# Altium PCB PCB_relay-module_2025-10-18.pcbdoc
Units mil, origin at the board's own origin, x right, y up, seen from the top; angles counter-clockwise.
Board outline 2788.96 x 1968.99 mil, 2 copper layers (Top Layer, Bottom Layer); 8 components, 8 nets, 18 pads, 0 vias.
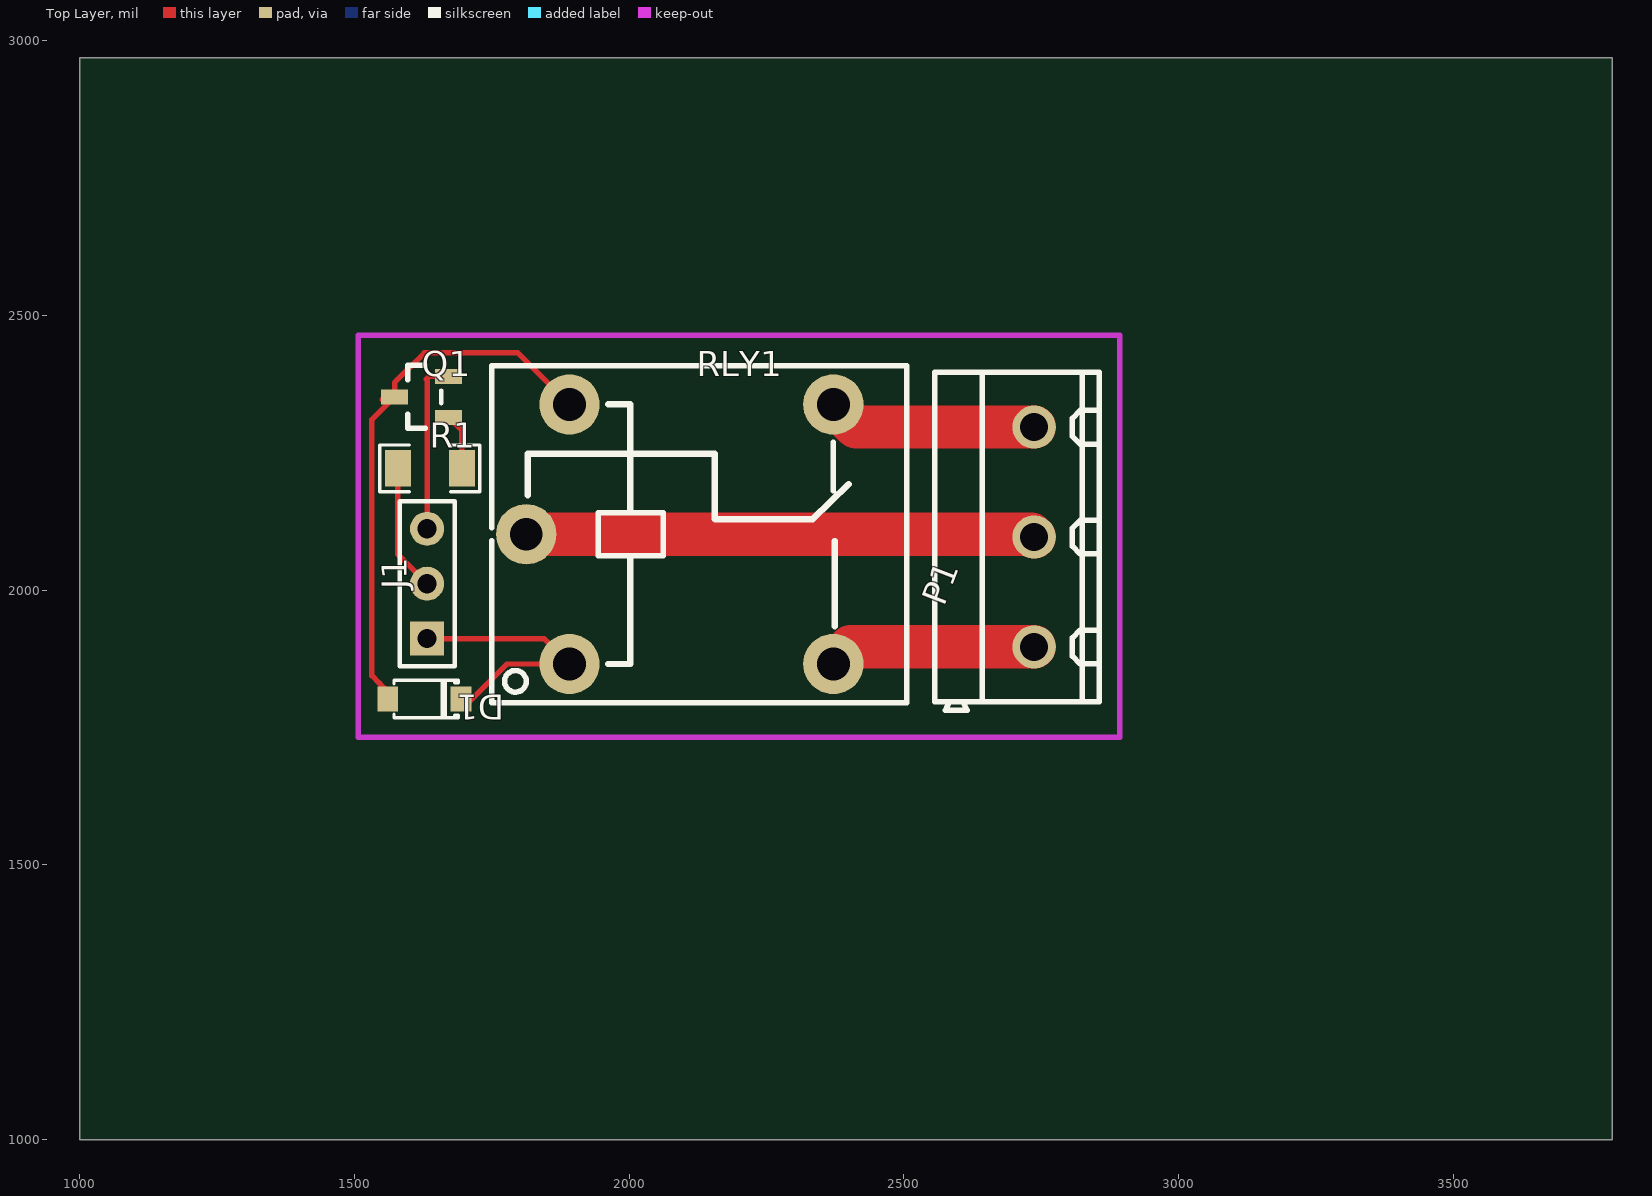
[diagram p0: Top Layer view]
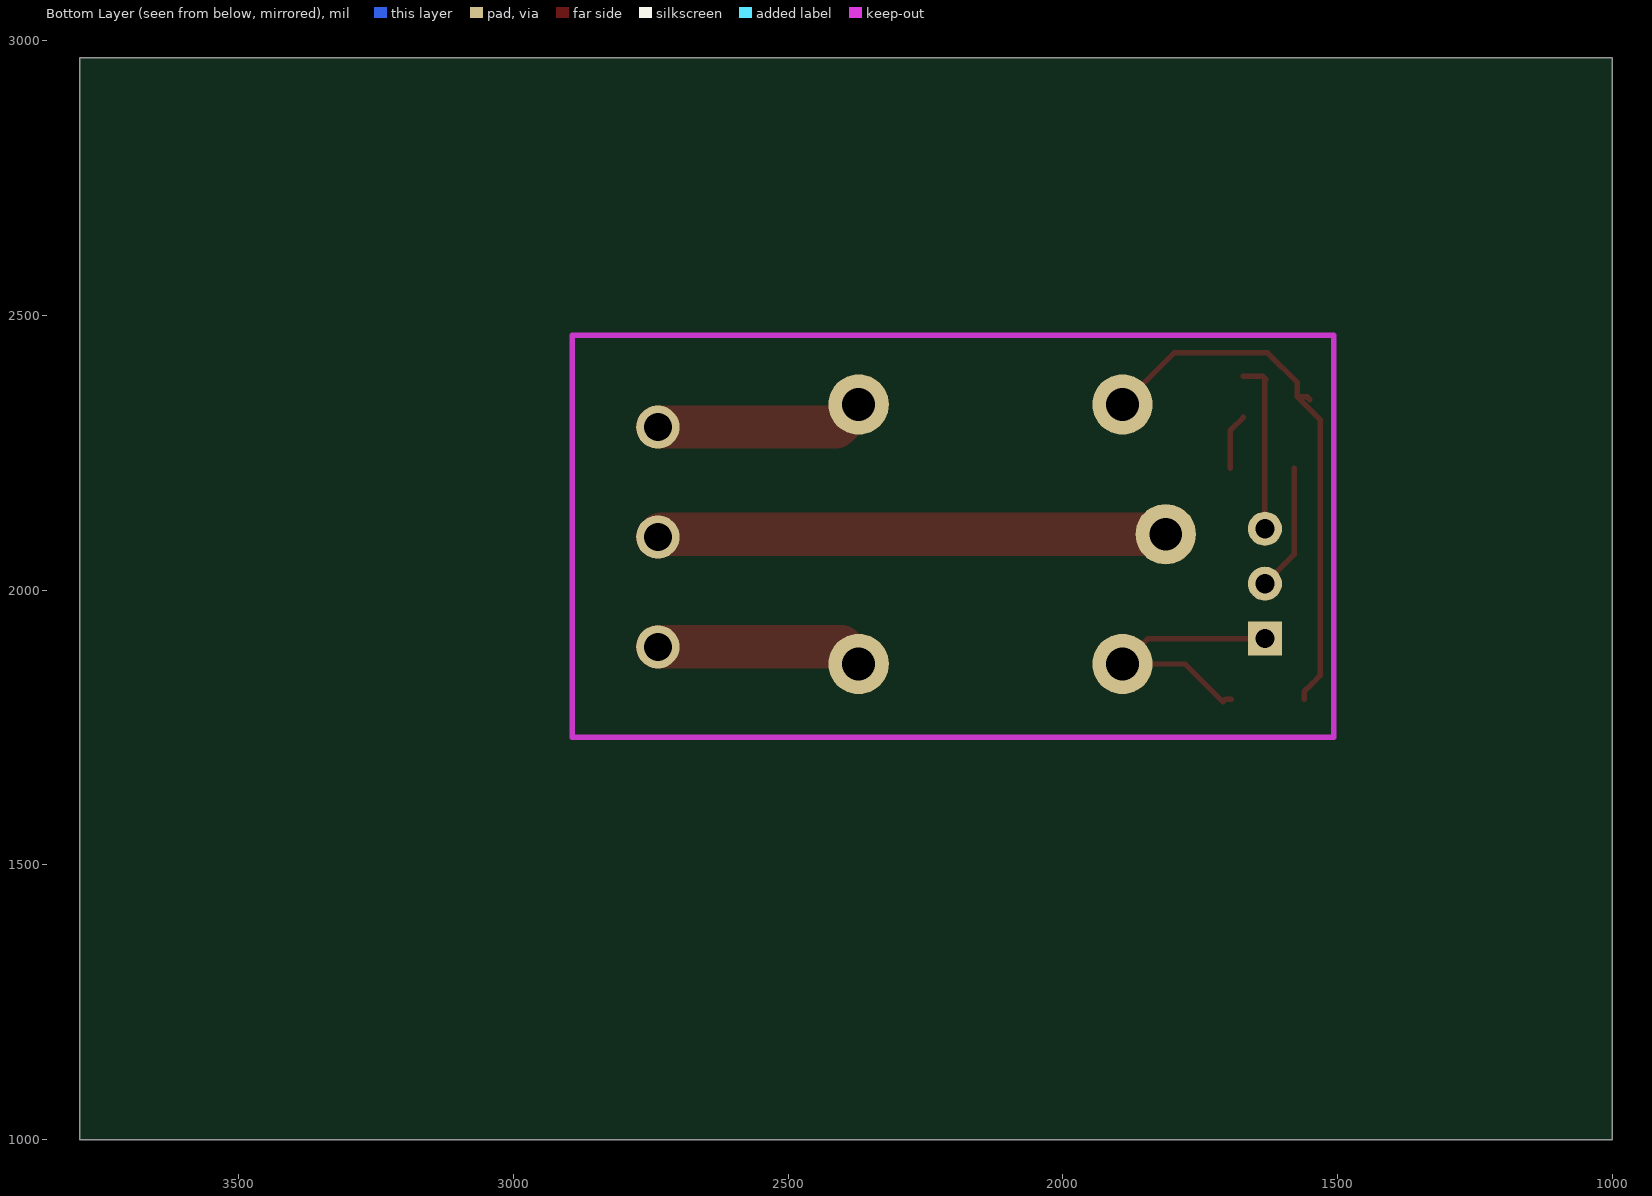
[diagram p1: Bottom Layer view, seen from below]

## Layer stack, top to bottom
Top Layer: signal copper (thickness not stored)
Dielectric: dielectric 12.6, FR-4, Dk 4.8
Bottom Layer: signal copper (thickness not stored)

## Board outline
3788.96,1000 1000,1000 1000,2968.99 3788.96,2968.99

## Components (designator, comment, footprint, x,y, rotation, side; value= is the part's Value field where it differs from the comment)
D1 "1N4007W" SOD-123_L2.8-W1.8-LS3.7-RD 1626.96,1801.99 r180 top
J1 "HDR-M-2.54_1x3" HDR-M-2.54_1X3 1631.96,2011.99 r90 top
P1 "CONN-TH_3P-P5.00" CONN-TH_3P-P5.00 2736.96,2096.99 r90 top
Q1 "2N3904(SOT-23)" SOT-23-3_L2.9-W1.3-P1.90-LS2.4-TR 1621.96,2351.99 r0 top
R1 "1k" R1206 1636.96,2221.99 r0 top
RLY1 "SRD-05VDC-SL-C" RELAY-TH_SRD-XXVDC-XL-C 2091.96,2101.99 r0 top
? "" ? 2197.83,1597.43 r0 top
? "" ? 3086.81,2091.99 r0 top

## Footprints (in the part's own frame and the unit in brackets; to place one, negate y for a bottom-side part, rotate by r counter-clockwise, add the part's x,y. Pads: shape width x height; smd on the part's side, far side on the other; paste and mask are expansions set on the pad)
CONN-TH_3P-P5.00 [mm]
  round 2 hole 1.3 paste+0 mask+0.051: 1(-5.08,0) 2(0,0) 3(5.08,0)
  silkscreen extent -8.02,-3 7.62,4.6
HDR-M-2.54_1X3 [mil]
  rect 62x62 hole 35 paste+0 mask+2: 1(-100,0)
  round 62 hole 35 paste+0 mask+2: 2(0,0) 3(100,0)
  silkscreen extent -150,-50 150,50
R1206 [mil]
  rect 47.54x66.97 smd paste-3937.01 mask+2: 1(-58.22,0) 2(58.22,0)
  silkscreen extent -91,-42 91,42
RELAY-TH_SRD-XXVDC-XL-C [mil]
  round 110 hole 60 paste+0 mask+2: 1(-200.79,-236.22) 2(279.53,-236.2) 3(279.53,236.2) 4(-200.79,236.22) 5(-279.53,0)
  silkscreen extent -342,-307 413,307
SOD-123_L2.8-W1.8-LS3.7-RD [mm]
  rect 0.95x1.15 smd paste+0 mask+0.051: 1(-1.693,0) 2(1.693,0)
  silkscreen extent -1.58,-0.87 1.41,0.87
SOT-23-3_L2.9-W1.3-P1.90-LS2.4-TR [mm]
  rect 1.25x0.7 smd paste+0 mask+0.051: 1(1.25,0.95) 2(1.25,-0.95) 3(-1.25,0)
  silkscreen extent -0.65,-1.46 0.9,1.46
? [mil]

## Nets (pads, with @x,y where several pads share a name; then routed paths per layer and width w, separated by ;. In a path a pad name is that pad's centre, name@x,y a point inside that pad or via, vN(x,y) a via of type N, cw(c..) or ccw(c..) an arc to the next point about the centre after c; other vN are vias at no path point)
+5V: D1.1 J1.1 RLY1.1 | length 506.5
  Top Layer w10: J1.1 1844.95,1911.99 RLY1.1 1777.06,1865.77 1708.28,1796.99 1703.28,1801.99 D1.1
GND: J1.3 Q1.1 | length 315.6
  Top Layer w10: J1.3 1631.96,2382.99 1630.56,2384.39 1635.56,2389.39 Q1.1
R1_1: J1.2 R1.1 | length 232
  Top Layer w10: R1.1 1578.74,2065.21 J1.2
R1_2: Q1.2 R1.2 | length 102.5
  Top Layer w10: Q1.2 1695.18,2290.57 R1.2
RLY1_2: P1.1 RLY1.2 | length 378.4
  Top Layer w78.74: RLY1.2 2402.69,1896.99 P1.1
RLY1_3: P1.3 RLY1.3 | length 382.5
  Top Layer w78.74: RLY1.3 2412.69,2296.99 P1.3
RLY1_4: D1.2 Q1.3 RLY1.4 | length 1009.5
  Top Layer w10: Q1.3@1549.96,2346.99 1554.96,2351.99 Q1.3 ; D1.2 1560.33,1815.62 1545.33,1830.62 1531.41,1844.54 1531.41,2310.64 Q1.3 ; RLY1.4 1797.36,2431.99 1626.96,2431.99 1572.76,2377.79 Q1.3
RLY1_5: P1.2 RLY1.5 | length 926.6
  Top Layer w78.74: RLY1.5 2731.96,2101.99 P1.2